# EAGLE board Super-Regenerative-FM.old (EAGLE 7.6.0)
Super-Regen FM Radio: "Radio Shack Special" http://ryanzachry.com/2013/01/super-regen-fm-radio/ http://electronics-diy.com/simple-fm-radio.php
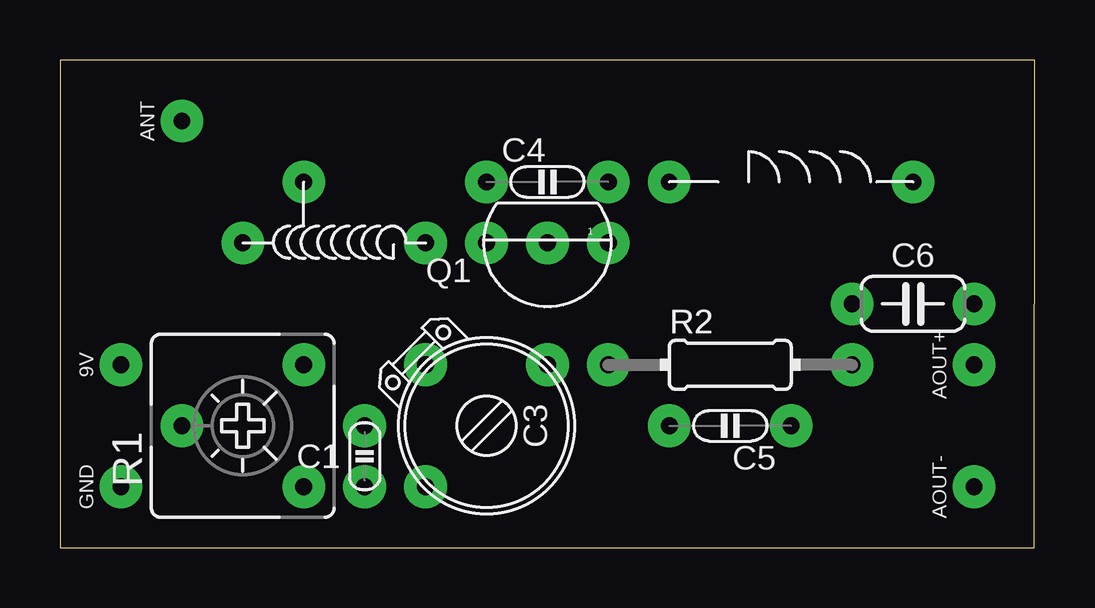
[diagram p0: board, top side]
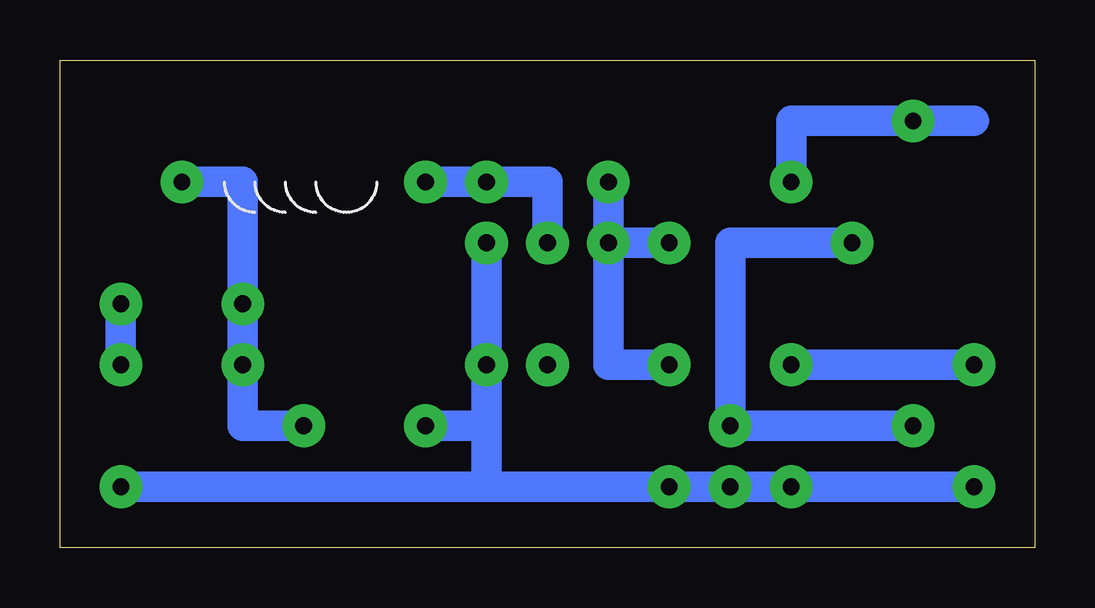
[diagram p1: board, bottom side, seen from below]

Size 40.64 x 20.32 mm. Coordinates in mm from the lower left corner, seen from the top.
Outline: 0,0 40.62,0 40.64,20.32 0,20.32 0,0
Copper layers (1*16): Top 0.035mm / dielectric 1.5mm / Bottom 0.035mm
Design rules "default": minimum track width 10mil, minimum drill 24mil, track to track 8mil, track to pad 8mil, pad to pad 8mil, via to via 8mil, smd to smd 8mil, copper to edge 40mil, drill to drill 8mil, minimum pad ring 10mil, minimum via ring 8mil, stop-mask expansion 4mil, vias tented up to drill 0mil, thermal gap 10mil
Net classes: 0 default: width 0.61 mm

## Footprints (pad centres in the part's own frame; a part is rotated, then mirrored left to right if it is on the bottom)
SPAD = drill 0.7 pad 1.778: 1 0,0
C025-015X024 = drill 0.7 pad 1.778: 1 0,1.27; 2 0,-1.27
TRIM-2222-808 = drill 0.7 pad 1.778: 1 -2.54,2.54; 2 -2.54,-2.54; 3 2.54,-2.54
C050-020X036 = drill 0.7 pad 1.778: 1 -2.54,0; 2 2.54,0
C050-024X044 = drill 0.7 pad 1.778: 1 -2.54,0; 2 2.54,0
L-02/7V-TAP1 = drill 0.7 pad 1.778: 1 0,3.81; 2 0,-3.81; 3 2.54,1.27
L-03/10V = drill 0.7 pad 1.778: 1 0,5.08; 2 0,-5.08
TO92 = drill 0.7 pad 1.778: 1 -2.54,0; 2 0,0; 3 2.54,0
POT-V = drill 0.7 pad 1.778: A -2.54,-2.54; E 2.54,-2.54; S 0,2.54
0204/10 = drill 0.7 pad 1.778: 1 -5.08,0; 2 5.08,0

## Placement (x,y rotation side)
9V  SPAD  [SPAD]  2.54,7.62 0 top
ANT  ANT  [SPAD]  5.08,17.78 0 top
AOUT+  SPAD  [SPAD]  38.1,7.62 0 top
AOUT-  SPAD  [SPAD]  38.1,2.54 0 top
C1  1n  [C025-015X024]  12.7,3.81 0 top
C3  15p  [TRIM-2222-808]  17.78,5.08 270 top
C4  47p  [C050-020X036]  20.32,15.24 0 top
C5  4.7n  [C050-020X036]  27.94,5.08 180 top
C6  100n  [C050-024X044]  35.56,10.16 0 top
GND  SPAD  [SPAD]  2.54,2.54 0 top
L1  [L-02/7V-TAP1]  11.43,12.7 90 top
L2  L02/10  [L-03/10V]  30.48,15.24 270 top
Q1  BF245B  [TO92]  20.32,12.7 180 top
R1  1kΩ  [POT-V]  7.62,5.08 90 top
R2  10kΩ  [0204/10]  27.94,7.62 0 top

## Library data of the parts
9V ANT AOUT+ AOUT- GND = pad
C1 C4-C6 = c
C3 = cap-trim
L1 L2 R1 R2 = r
Q1 = t

## Nets
GND: AOUT-.1 C1.2 C3.3 C5.2 GND.1 Q1.1 R1.A R2.1
N$1: 9V.1 R1.E
N$2: C3.2 C4.1 L1.2 Q1.3
N$3: C1.1 L1.1 R1.S
N$4: ANT.1 L1.3
N$5: C4.2 L2.2 Q1.2
N$6: C5.1 C6.1 L2.1 R2.2
N$8: AOUT+.1 C6.2

## Tracks (layer width: path | path; a pad name or v marks a point on that pad's centre or on a via)
GND
  Bottom 1.27: 22.86,2.54 C3.3 C1.2 R1.A GND.1 | 22.86,5.08 22.86,2.54 | Q1.1 R2.1 22.86,5.08 | 22.86,5.08 C5.2 | AOUT-.1 22.86,2.54
N$1
  Bottom 1.27: R1.E 9V.1
N$2
  Bottom 1.27: Q1.3 L1.2 | L1.2 Q1.3 | Q1.3 C4.1 | C3.2 17.78,7.62 Q1.3 | Q1.3 L1.2
N$3
  Bottom 1.27: R1.S C1.1 12.7,12.7 L1.1
N$4
  Bottom 1.27: L1.3 10.16,17.78 2.54,17.78 ANT.1
N$5
  Bottom 1.27: L2.2 C4.2 20.32,15.24 Q1.2
N$6
  Bottom 1.27: C5.1 33.02,5.08 R2.2 C6.1 33.02,15.24 L2.1
N$8
  Bottom 1.27: C6.2 AOUT+.1